# Altium PCB Inc_filter_v2.PcbDoc (part 1 of 4)
Units mm, origin at the board's own origin, x right, y up, seen from the top; angles counter-clockwise.
Board outline 339.6 x 339.6 mm, 2 copper layers (Top Layer, Bottom Layer); 640 components, 290 nets, 1708 pads, 357 vias.
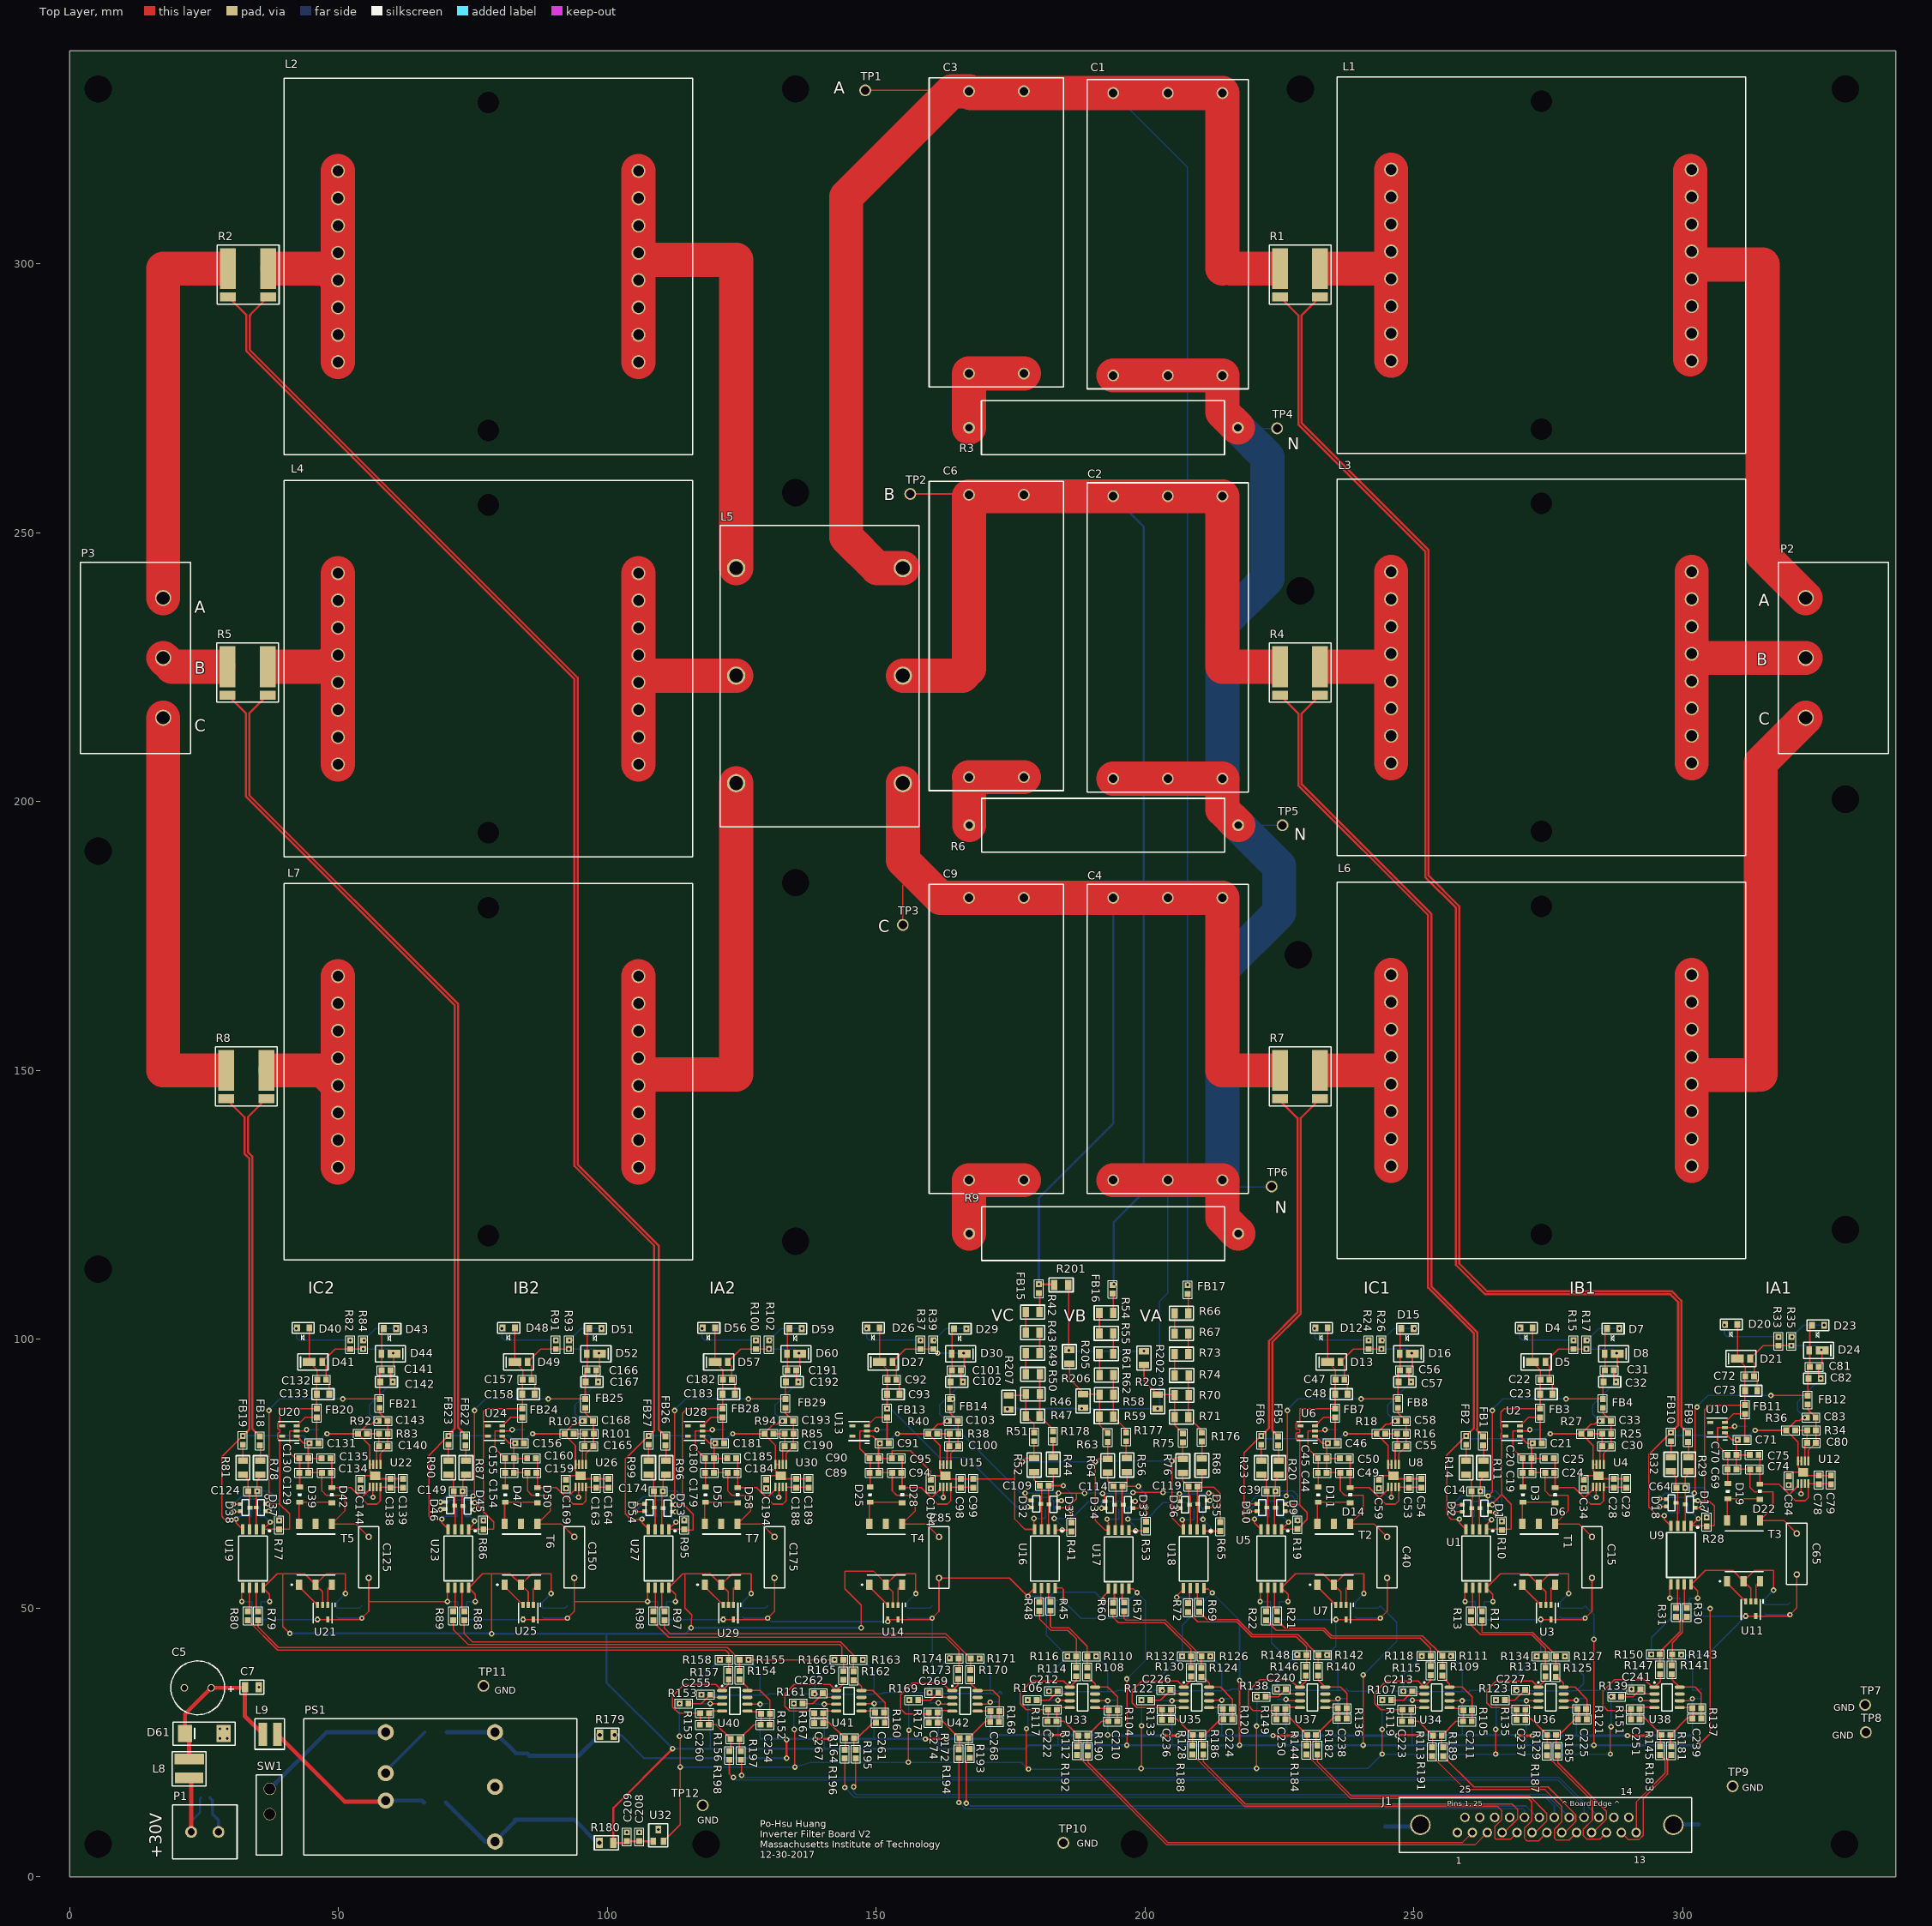
[diagram p0: Top Layer view]
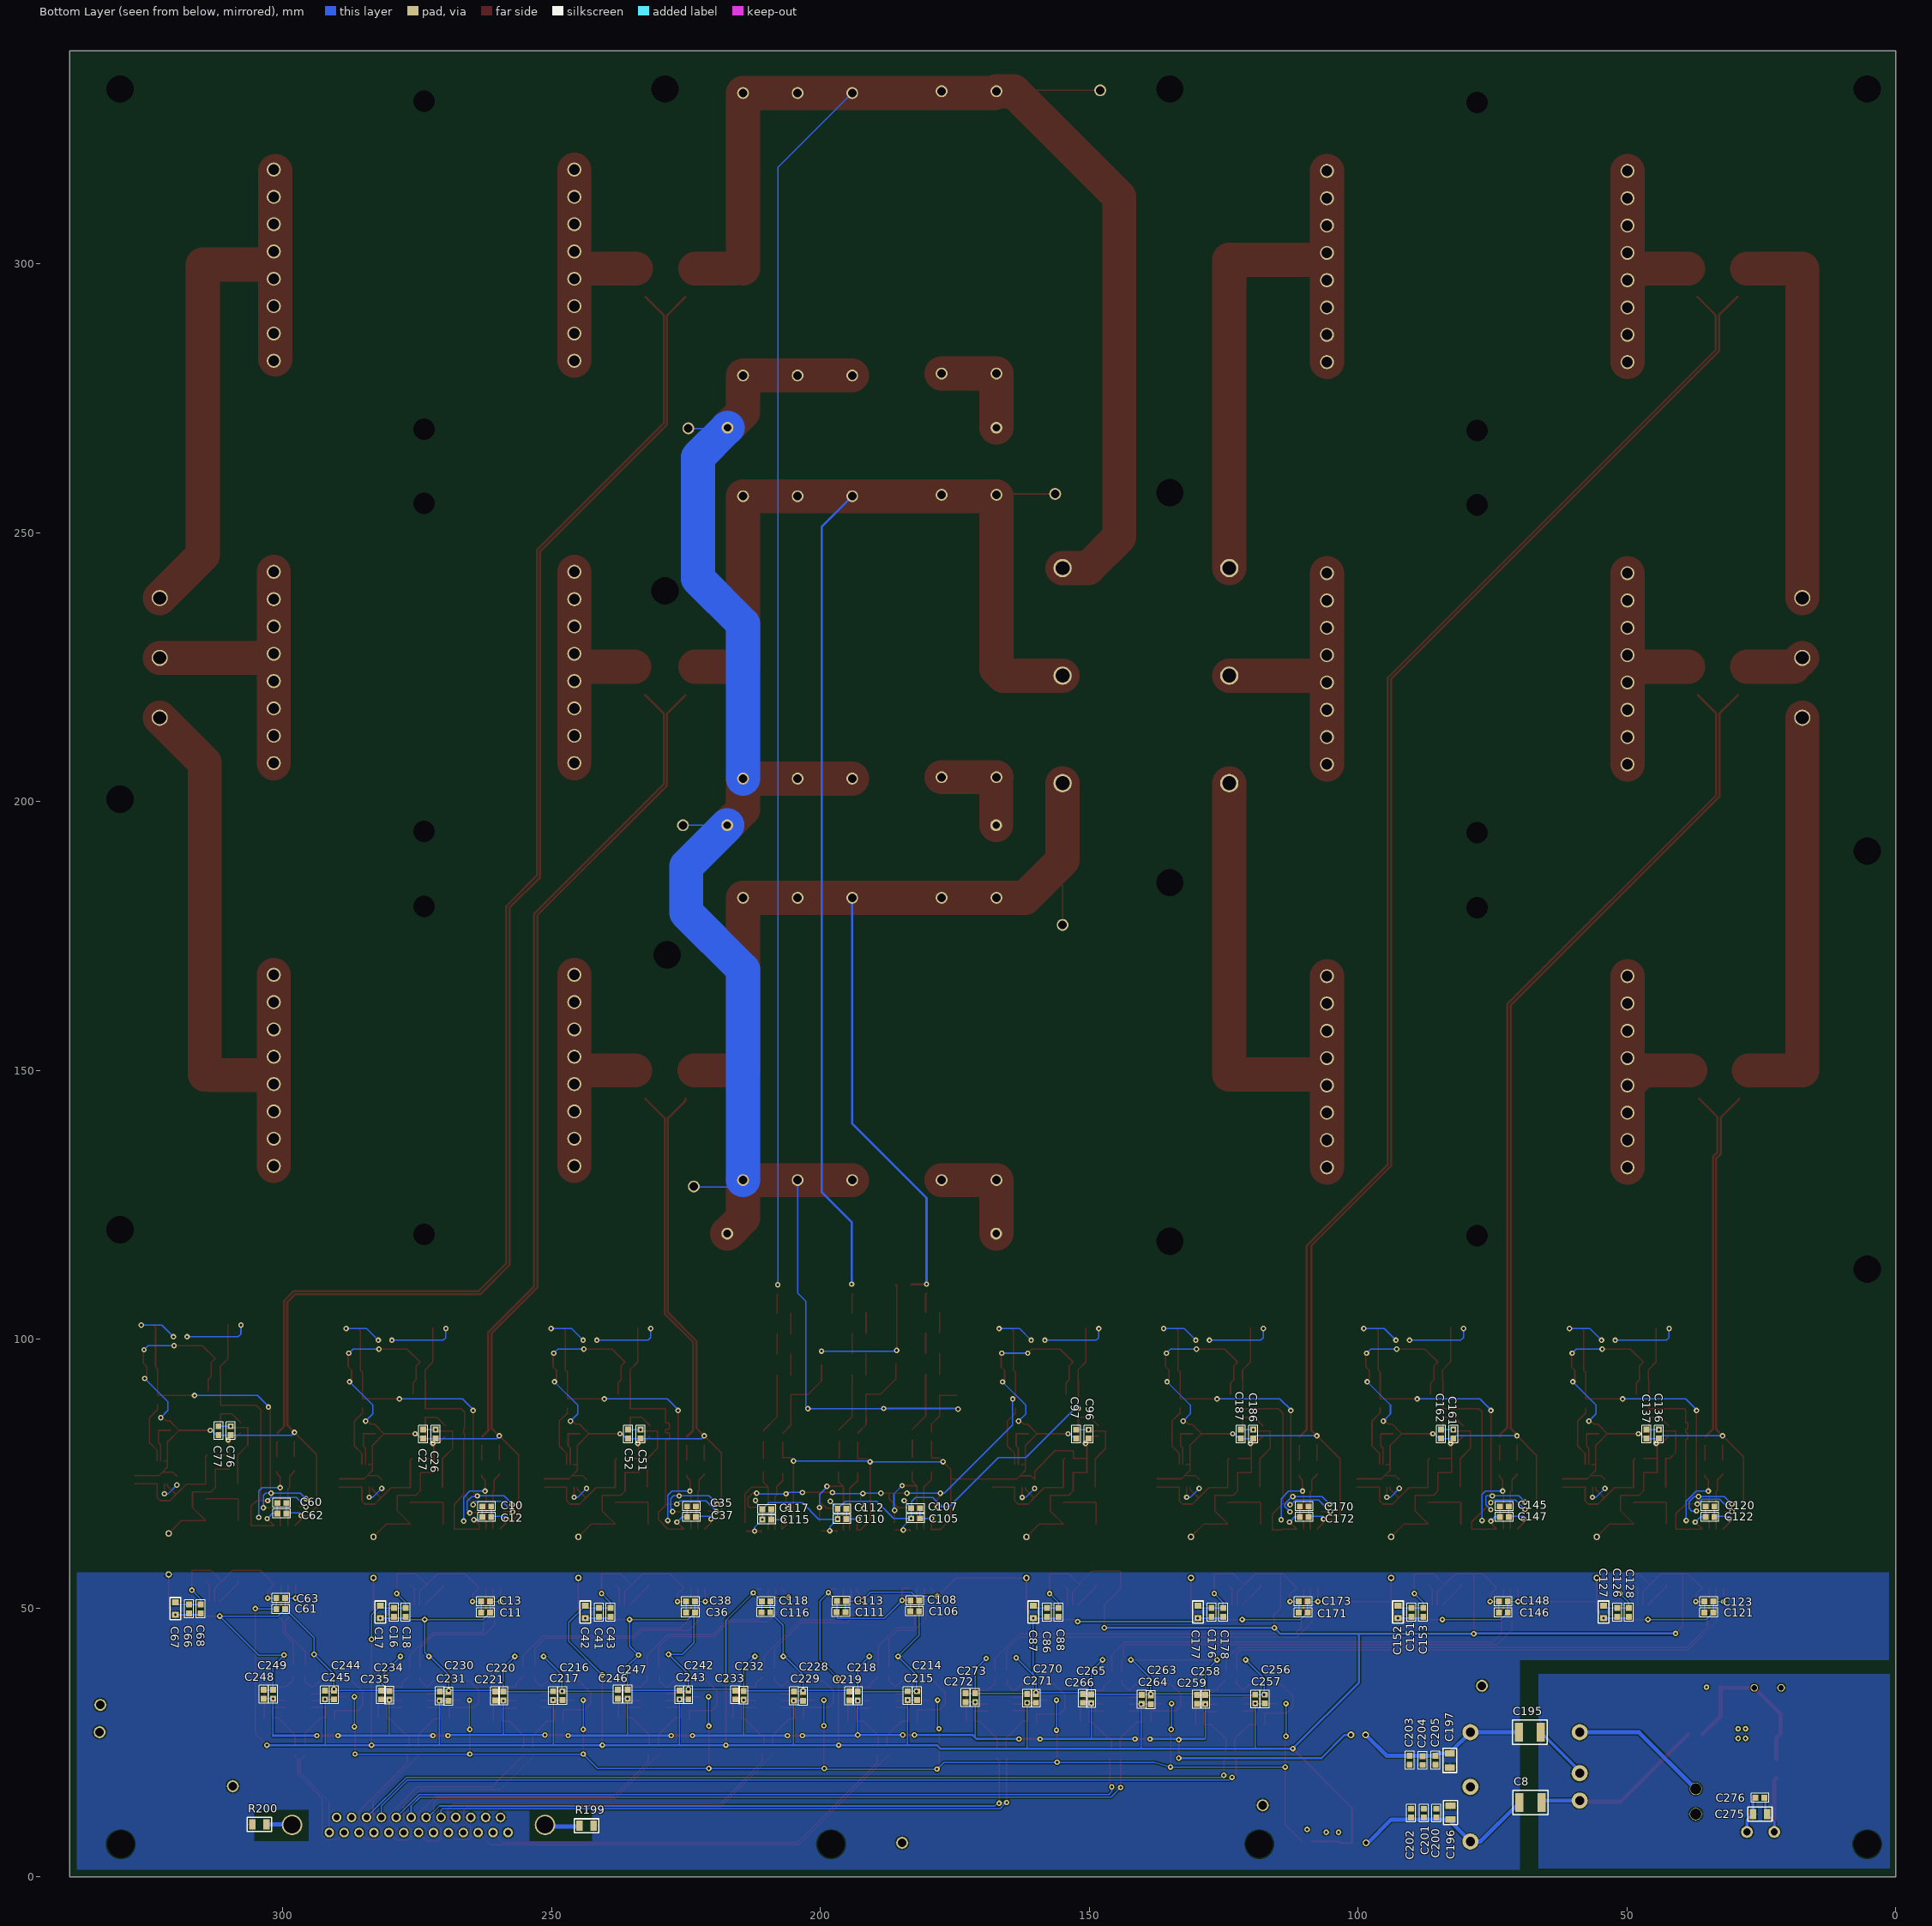
[diagram p1: Bottom Layer view, seen from below]

## Layer stack, top to bottom
Top Solder: solder mask 0.0102, Solder Resist, Dk 3.5
Top Layer: signal copper 0.0711
Dielectric 1: dielectric 0.32, FR-4, Dk 4.8
Bottom Layer: signal copper 0.0711
Bottom Solder: solder mask 0.0102, Solder Resist, Dk 3.5

## Board outline
0,0 339.598,0 339.598,339.598 0,339.598

## Design rules (kind name [scope] priority, off if disabled: settings)
Clearance [All] p1: gap=0.203 ignorepadtopadclearanceinfootprint=FALSE
HoleSize [All] p1: absolutevalues=TRUE maxlimit=5.08 minlimit=0.381 maxpercent=80.000 minpercent=20.000
MinimumSolderMaskSliver [All] p1: minsoldermaskwidth=0.152
PolygonConnect [All] p1: connectstyle=Relief reliefconductorwidth=0.254 reliefentries=4 polygonreliefangle="90 Angle" airgapwidth=0.254
RoutingVias [All] p1: holewidth=0.508 width=1.016 viastyle="Through Hole" minholewidth=0.508 minwidth=1.016 maxholewidth=0.635 maxwidth=1.27
SilkToSilkClearance [All] p1 off: silktosilkclearance=0.254
SilkToSolderMaskClearance [IsPad] p1 off: minsilkscreentomaskgap=0.254 clearancetoexposedcopper=TRUE
SolderMaskExpansion [All] p1: expansion=0
Width [All] p1: maxlimit=10.16 minlimit=0.178 preferedwidth=0.254
26 further rules are at their usual default settings.

## Classes and differential pairs
component class "Power Supply": C5 C7 C8 C195 C196 C197 C200 C201 C202 C203 C204 C205 C275 C276 D61 L8 L9 P1 PS1 R179 R180 SW1
component class Out_current_sensor_UVW: C120 C121 C122 C123 C124 C125 C126 C127 C128 C129 C130 C131 C132 C133 C134 C135 C136 C137 C138 C139 C140 C141 C142 C143 C144 C145 C146 C147 C148 C149 C150 C151 C152 C153 C154 C155 C156 C157 C158 C159 C160 C161 C162 C163 C164 C165 C166 C167 C168 C169 C170 C171 C172 C173 C174 C175 C176 C177 C178 C179 C180 C181 C182 C183 C184 C185 C186 C187 C188 C189 C190 C191 C192 C193 C194 D37 D38 D39 D40 D41 D42 D43 D44 D45 D46 D47 D48 D49 D50 D51 D52 D53 D54 D55 D56 D57 D58 D59 D60 FB18 FB19 FB20 FB21 FB22 FB23 FB24 FB25 FB26 FB27 FB28 FB29 R77 R78 R79 R80 R81 R82 R83 R84 R85 R86 R87 R88 R89 R90 R91 R92 R93 R94 R95 R96 R97 R98 R99 R100 R101 R102 R103 T5 T6 T7 U19 U20 U21 U22 U23 U24 U25 U26 U27 U28 U29 U30
component class Voltage_sensor_UVW: C85 C86 C87 C88 C89 C90 C91 C92 C93 C94 C95 C96 C97 C98 C99 C100 C101 C102 C103 C104 C105 C106 C107 C108 C109 C110 C111 C112 C113 C114 C115 C116 C117 C118 C119 D25 D26 D27 D28 D29 D30 D31 D32 D33 D34 D35 D36 FB13 FB14 FB15 FB16 FB17 R37 R38 R39 R40 R41 R42 R43 R44 R45 R46 R47 R48 R49 R50 R51 R52 R53 R54 R55 R56 R57 R58 R59 R60 R61 R62 R63 R64 R65 R66 R67 R68 R69 R70 R71 R72 R73 R74 R75 R76 R176 R177 R178 R201 R202 R203 R205 R206 R207 R? T4 U13 U14 U15 U16 U17 U18
component class Ind_current_sensor: C10 C11 C12 C13 C14 C15 C16 C17 C18 C19 C20 C21 C22 C23 C24 C25 C26 C27 C28 C29 C30 C31 C32 C33 C34 C35 C36 C37 C38 C39 C40 C41 C42 C43 C44 C45 C46 C47 C48 C49 C50 C51 C52 C53 C54 C55 C56 C57 C58 C59 C60 C61 C62 C63 C64 C65 C66 C67 C68 C69 C70 C71 C72 C73 C74 C75 C76 C77 C78 C79 C80 C81 C82 C83 C84 D1 D2 D3 D4 D5 D6 D7 D8 D9 D10 D11 D12 D13 D14 D15 D16 D17 D18 D19 D20 D21 D22 D23 D24 FB1 FB2 FB3 FB4 FB5 FB6 FB7 FB8 FB9 FB10 FB11 FB12 R10 R11 R12 R13 R14 R15 R16 R17 R18 R19 R20 R21 R22 R23 R24 R25 R26 R27 R28 R29 R30 R31 R32 R33 R34 R35 R36 T1 T2 T3 U1 U2 U3 U4 U5 U6 U7 U8 U9 U10 U11 U12
component class LCL: C1 C2 C3 C4 C6 C9 L1 L2 L3 L4 L5 L6 P2 P3 R1 R2 R3 R4 R5 R6 R7 R8 R9 TP1 TP2 TP3 TP4 TP5 TP6
component class "Analog Transmission": C208 C209 C210 C211 C212 C213 C214 C215 C216 C217 C218 C219 C220 C221 C222 C223 C224 C225 C226 C227 C228 C229 C230 C231 C232 C233 C234 C235 C236 C237 C238 C239 C240 C241 C242 C243 C244 C245 C246 C247 C248 C249 C250 C251 C254 C255 C256 C257 C258 C259 C260 C261 C262 C263 C264 C265 C266 C267 C268 C269 C270 C271 C272 C273 C274 J1 R104 R105 R106 R107 R108 R109 R110 R111 R112 R113 R114 R115 R116 R117 R118 R119 R120 R121 R122 R123 R124 R125 R126 R127 R128 R129 R130 R131 R132 R133 R134 R135 R136 R137 R138 R139 R140 R141 R142 R143 R144 R145 R146 R147 R148 R149 R150 R151 R152 R153 R154 R155 R156 R157 R158 R159 R160 R161 R162 R163 R164 R165 R166 R167 R168 R169 R170 R171 R172 R173 R174 R175 R181 R182 R183 R184 R185 R186 R187 R188 R189 R190 R191 R192 R193 R194 R195 R196 R197 R198 R199 R200 TP7 TP8 TP9 TP10 TP11 TP12 U32 U36 U38

## Components (designator, comment, footprint, x,y, rotation, side; value= is the part's Value field where it differs from the comment)
C1 "Cap Film Radial - 4 Leads" "Radial - 4 Leads - 30uF" 204.216,305.47 r90 top
C2 "Cap Film Radial - 4 Leads" "Radial - 4 Leads - 30uF" 204.216,230.505 r90 top
C3 "Cap Film Radial - 4 Leads" "Radial - 4 Leads" 172.339,305.816 r90 top
C4 "Cap Film Radial - 4 Leads" "Radial - 4 Leads - 30uF" 204.216,155.837 r90 top
C5 "330uF 50V" "Panasonic ECA-1HM331" 26.336,35.179 r180 top
C6 "Cap Film Radial - 4 Leads" "Radial - 4 Leads" 172.339,230.759 r90 top
C7 "Cap 1206" 1206 33.909,35.306 r180 top value="1uF 50V"
C8 "Cap 1nF 2kV" "1812 (4532 Metric)" 67.945,13.843 r90 bottom
C9 "Cap Film Radial - 4 Leads" "Radial - 4 Leads" 172.339,155.837 r90 top
C10 "Cap 0603_new" "0603 (1608 Metric)" 262.039,68.909 r0 bottom value=1uF
C11 "Cap 0603_new" "0603 (1608 Metric)" 262.23,49.199 r180 bottom value=1uF
C12 "Cap 0603_new" "0603 (1608 Metric)" 262.039,66.979 r0 bottom value=0.1uF
C13 "Cap 0603_new" "0603 (1608 Metric)" 262.23,51.231 r180 bottom value=0.1uF
C14 "Cap 0603_new" "0603 (1608 Metric)" 261.518,71.754 r180 top value=330pF
C15 "Cap TH" RAD-0.3 283.09,59.436 r90 top value=1000pF
C16 "Cap 0603_new" "0603 (1608 Metric)" 279.28,49.212 r90 bottom value=10uF
C17 "Cap 0805" "0805 (2012 metric)" 281.82,49.276 r90 bottom value=22uF
C18 "Cap 0603_new" "0603 (1608 Metric)" 277.121,49.212 r90 bottom value=0.1uF
C19 "Cap 0603_new" "0603 (1608 Metric)" 271.025,75.184 r180 top value=10uF
C20 "Cap 0603_new" "0603 (1608 Metric)" 271.025,77.851 r180 top value=0.1uF
C21 "Cap 0603_new" "0603 (1608 Metric)" 272.93,80.645 r0 top value=10uF
C22 "Cap 0603_new" "0603 (1608 Metric)" 274.327,92.456 r180 top value=0.1uF
C23 "Cap 0805" "0805 (2012 metric)" 274.581,89.789 r180 top value=4.7uF
C24 "Cap 0603_new" "0603 (1608 Metric)" 275.216,75.184 r180 top value=10uF
C25 "Cap 0603_new" "0603 (1608 Metric)" 275.153,77.851 r180 top value=0.1uF
C26 "Cap 0603_new" "0603 (1608 Metric)" 271.533,82.36 r90 bottom value=10uF
C27 "Cap 0603_new" "0603 (1608 Metric)" 273.819,82.36 r90 bottom value=0.1uF
C28 "Cap 0603_new" "0603 (1608 Metric)" 287.154,73.215 r270 top value=10uF
C29 "Cap 0603_new" "0603 (1608 Metric)" 289.44,73.216 r270 top value=0.1uF
C30 "Cap 0603_new" "0603 (1608 Metric)" 285.821,80.137 r180 top value=0.01uF
C31 "Cap 0603_new" "0603 (1608 Metric)" 286.329,94.234 r180 top value=0.1uF
C32 "Cap 0805" "0805 (2012 metric)" 286.385,92.075 r180 top value=4.7uF
C33 "Cap 0603_new" "0603 (1608 Metric)" 285.757,84.836 r0 top value=10uF
C34 "Cap 0603_new" "0603 (1608 Metric)" 281.566,73.088 r270 top value=0.01uF
C35 "Cap 0603_new" "0603 (1608 Metric)" 223.939,68.909 r0 bottom value=1uF
C36 "Cap 0603_new" "0603 (1608 Metric)" 224.13,49.199 r180 bottom value=1uF
C37 "Cap 0603_new" "0603 (1608 Metric)" 223.939,66.979 r0 bottom value=0.1uF
C38 "Cap 0603_new" "0603 (1608 Metric)" 224.13,51.231 r180 bottom value=0.1uF
C39 "Cap 0603_new" "0603 (1608 Metric)" 223.418,71.754 r180 top value=330pF
C40 "Cap TH" RAD-0.3 244.99,59.436 r90 top value=1000pF
C41 "Cap 0603_new" "0603 (1608 Metric)" 241.18,49.212 r90 bottom value=10uF
C42 "Cap 0805" "0805 (2012 metric)" 243.72,49.276 r90 bottom value=22uF
C43 "Cap 0603_new" "0603 (1608 Metric)" 239.021,49.212 r90 bottom value=0.1uF
C44 "Cap 0603_new" "0603 (1608 Metric)" 232.925,75.184 r180 top value=10uF
C45 "Cap 0603_new" "0603 (1608 Metric)" 232.925,77.851 r180 top value=0.1uF
C46 "Cap 0603_new" "0603 (1608 Metric)" 234.83,80.645 r0 top value=10uF
C47 "Cap 0603_new" "0603 (1608 Metric)" 236.227,92.456 r180 top value=0.1uF
C48 "Cap 0805" "0805 (2012 metric)" 236.481,89.789 r180 top value=4.7uF
C49 "Cap 0603_new" "0603 (1608 Metric)" 237.116,75.184 r180 top value=10uF
C50 "Cap 0603_new" "0603 (1608 Metric)" 237.053,77.851 r180 top value=0.1uF
C51 "Cap 0603_new" "0603 (1608 Metric)" 233.433,82.36 r90 bottom value=10uF
C52 "Cap 0603_new" "0603 (1608 Metric)" 235.719,82.36 r90 bottom value=0.1uF
C53 "Cap 0603_new" "0603 (1608 Metric)" 249.054,73.215 r270 top value=10uF
C54 "Cap 0603_new" "0603 (1608 Metric)" 251.34,73.216 r270 top value=0.1uF
C55 "Cap 0603_new" "0603 (1608 Metric)" 247.721,80.137 r180 top value=0.01uF
C56 "Cap 0603_new" "0603 (1608 Metric)" 248.229,94.234 r180 top value=0.1uF
C57 "Cap 0805" "0805 (2012 metric)" 248.285,92.075 r180 top value=4.7uF
C58 "Cap 0603_new" "0603 (1608 Metric)" 247.657,84.836 r0 top value=10uF
C59 "Cap 0603_new" "0603 (1608 Metric)" 243.466,73.088 r270 top value=0.01uF
C60 "Cap 0603_new" "0603 (1608 Metric)" 300.132,69.544 r0 bottom value=1uF
C61 "Cap 0603_new" "0603 (1608 Metric)" 300.323,49.834 r180 bottom value=1uF
C62 "Cap 0603_new" "0603 (1608 Metric)" 300.132,67.614 r0 bottom value=0.1uF
C63 "Cap 0603_new" "0603 (1608 Metric)" 300.323,51.866 r180 bottom value=0.1uF
C64 "Cap 0603_new" "0603 (1608 Metric)" 299.611,72.389 r180 top value=330pF
C65 "Cap TH" RAD-0.3 321.183,60.071 r90 top value=1000pF
C66 "Cap 0603_new" "0603 (1608 Metric)" 317.373,49.847 r90 bottom value=10uF
C67 "Cap 0805" "0805 (2012 metric)" 319.913,49.911 r90 bottom value=22uF
C68 "Cap 0603_new" "0603 (1608 Metric)" 315.214,49.847 r90 bottom value=0.1uF
C69 "Cap 0603_new" "0603 (1608 Metric)" 309.118,75.819 r180 top value=10uF
C70 "Cap 0603_new" "0603 (1608 Metric)" 309.118,78.486 r180 top value=0.1uF
C71 "Cap 0603_new" "0603 (1608 Metric)" 311.023,81.28 r0 top value=10uF
C72 "Cap 0603_new" "0603 (1608 Metric)" 312.42,93.091 r180 top value=0.1uF
C73 "Cap 0805" "0805 (2012 metric)" 312.674,90.424 r180 top value=4.7uF
C74 "Cap 0603_new" "0603 (1608 Metric)" 313.309,75.819 r180 top value=10uF
C75 "Cap 0603_new" "0603 (1608 Metric)" 313.246,78.486 r180 top value=0.1uF
C76 "Cap 0603_new" "0603 (1608 Metric)" 309.626,82.995 r90 bottom value=10uF
C77 "Cap 0603_new" "0603 (1608 Metric)" 311.912,82.995 r90 bottom value=0.1uF
C78 "Cap 0603_new" "0603 (1608 Metric)" 325.247,73.85 r270 top value=10uF
C79 "Cap 0603_new" "0603 (1608 Metric)" 327.533,73.851 r270 top value=0.1uF
C80 "Cap 0603_new" "0603 (1608 Metric)" 323.914,80.772 r180 top value=0.01uF
C81 "Cap 0603_new" "0603 (1608 Metric)" 324.422,94.869 r180 top value=0.1uF
C82 "Cap 0805" "0805 (2012 metric)" 324.478,92.71 r180 top value=4.7uF
C83 "Cap 0603_new" "0603 (1608 Metric)" 323.85,85.471 r0 top value=10uF
C84 "Cap 0603_new" "0603 (1608 Metric)" 319.659,73.723 r270 top value=0.01uF
C85 "Cap TH" RAD-0.3 161.671,59.429 r90 top value=1000pF
C86 "Cap 0603_new" "0603 (1608 Metric)" 157.861,49.205 r90 bottom value=10uF
C87 "Cap 0805" "0805 (2012 metric)" 160.401,49.269 r90 bottom value=22uF
C88 "Cap 0603_new" "0603 (1608 Metric)" 155.702,49.205 r90 bottom value=0.1uF
C89 "Cap 0603_new" "0603 (1608 Metric)" 149.606,75.177 r180 top value=10uF
C90 "Cap 0603_new" "0603 (1608 Metric)" 149.606,77.844 r180 top value=0.1uF
C91 "Cap 0603_new" "0603 (1608 Metric)" 151.511,80.638 r0 top value=10uF
C92 "Cap 0603_new" "0603 (1608 Metric)" 152.908,92.449 r180 top value=0.1uF
C93 "Cap 0805" "0805 (2012 metric)" 153.162,89.782 r180 top value=4.7uF
C94 "Cap 0603_new" "0603 (1608 Metric)" 153.797,75.177 r180 top value=10uF
C95 "Cap 0603_new" "0603 (1608 Metric)" 153.734,77.844 r180 top value=0.1uF
C96 "Cap 0603_new" "0603 (1608 Metric)" 150.114,82.353 r90 bottom value=10uF
C97 "Cap 0603_new" "0603 (1608 Metric)" 152.4,82.353 r90 bottom value=0.1uF
C98 "Cap 0603_new" "0603 (1608 Metric)" 165.735,73.208 r270 top value=10uF
C99 "Cap 0603_new" "0603 (1608 Metric)" 168.021,73.209 r270 top value=0.1uF
C100 "Cap 0603_new" "0603 (1608 Metric)" 164.402,80.13 r180 top value=0.01uF
C101 "Cap 0603_new" "0603 (1608 Metric)" 164.91,94.227 r180 top value=0.1uF
C102 "Cap 0805" "0805 (2012 metric)" 164.966,92.068 r180 top value=4.7uF
C103 "Cap 0603_new" "0603 (1608 Metric)" 164.338,84.829 r0 top value=10uF
C104 "Cap 0603_new" "0603 (1608 Metric)" 160.147,73.081 r270 top value=0.01uF
C105 "Cap 0603_new" "0603 (1608 Metric)" 182.275,66.675 r0 bottom value=1uF
C106 "Cap 0603_new" "0603 (1608 Metric)" 182.466,49.403 r180 bottom value=1uF
C107 "Cap 0603_new" "0603 (1608 Metric)" 182.275,68.58 r0 bottom value=0.1uF
C108 "Cap 0603_new" "0603 (1608 Metric)" 182.402,51.435 r180 bottom value=0.1uF
C109 "Cap 0603_new" "0603 (1608 Metric)" 181.259,72.771 r180 top value=330pF
C110 "Cap 0603_new" "0603 (1608 Metric)" 195.96,66.547 r0 bottom value=1uF
C111 "Cap 0603_new" "0603 (1608 Metric)" 196.151,49.275 r180 bottom value=1uF
C112 "Cap 0603_new" "0603 (1608 Metric)" 195.96,68.452 r0 bottom value=0.1uF
C113 "Cap 0603_new" "0603 (1608 Metric)" 196.087,51.307 r180 bottom value=0.1uF
C114 "Cap 0603_new" "0603 (1608 Metric)" 194.944,72.643 r180 top value=330pF
C115 "Cap 0603_new" "0603 (1608 Metric)" 209.931,66.484 r0 bottom value=1uF
C116 "Cap 0603_new" "0603 (1608 Metric)" 210.122,49.212 r180 bottom value=1uF
C117 "Cap 0603_new" "0603 (1608 Metric)" 209.931,68.389 r0 bottom value=0.1uF
C118 "Cap 0603_new" "0603 (1608 Metric)" 210.058,51.244 r180 bottom value=0.1uF
C119 "Cap 0603_new" "0603 (1608 Metric)" 208.915,72.58 r180 top value=330pF
C120 "Cap 0603_new" "0603 (1608 Metric)" 34.575,68.909 r0 bottom value=1uF
C121 "Cap 0603_new" "0603 (1608 Metric)" 34.766,49.199 r180 bottom value=1uF
C122 "Cap 0603_new" "0603 (1608 Metric)" 34.575,66.979 r0 bottom value=0.1uF
C123 "Cap 0603_new" "0603 (1608 Metric)" 34.766,51.231 r180 bottom value=0.1uF
C124 "Cap 0603_new" "0603 (1608 Metric)" 34.054,71.754 r180 top value=330pF
C125 "Cap TH" RAD-0.3 55.626,59.436 r90 top value=1000pF
C126 "Cap 0603_new" "0603 (1608 Metric)" 51.816,49.212 r90 bottom value=10uF
C127 "Cap 0805" "0805 (2012 metric)" 54.356,49.276 r90 bottom value=22uF
C128 "Cap 0603_new" "0603 (1608 Metric)" 49.657,49.212 r90 bottom value=0.1uF
C129 "Cap 0603_new" "0603 (1608 Metric)" 43.561,75.184 r180 top value=10uF
C130 "Cap 0603_new" "0603 (1608 Metric)" 43.561,77.851 r180 top value=0.1uF
C131 "Cap 0603_new" "0603 (1608 Metric)" 45.466,80.645 r0 top value=10uF
C132 "Cap 0603_new" "0603 (1608 Metric)" 46.863,92.456 r180 top value=0.1uF
C133 "Cap 0805" "0805 (2012 metric)" 47.117,89.789 r180 top value=4.7uF
C134 "Cap 0603_new" "0603 (1608 Metric)" 47.752,75.184 r180 top value=10uF
C135 "Cap 0603_new" "0603 (1608 Metric)" 47.689,77.851 r180 top value=0.1uF
C136 "Cap 0603_new" "0603 (1608 Metric)" 44.069,82.36 r90 bottom value=10uF
C137 "Cap 0603_new" "0603 (1608 Metric)" 46.355,82.36 r90 bottom value=0.1uF
C138 "Cap 0603_new" "0603 (1608 Metric)" 59.69,73.215 r270 top value=10uF
C139 "Cap 0603_new" "0603 (1608 Metric)" 61.976,73.216 r270 top value=0.1uF
C140 "Cap 0603_new" "0603 (1608 Metric)" 58.357,80.137 r180 top value=0.01uF
C141 "Cap 0603_new" "0603 (1608 Metric)" 58.865,94.234 r180 top value=0.1uF
C142 "Cap 0805" "0805 (2012 metric)" 58.921,92.075 r180 top value=4.7uF
C143 "Cap 0603_new" "0603 (1608 Metric)" 58.293,84.836 r0 top value=10uF
C144 "Cap 0603_new" "0603 (1608 Metric)" 54.102,73.088 r270 top value=0.01uF
C145 "Cap 0603_new" "0603 (1608 Metric)" 72.802,68.909 r0 bottom value=1uF
C146 "Cap 0603_new" "0603 (1608 Metric)" 72.993,49.199 r180 bottom value=1uF
C147 "Cap 0603_new" "0603 (1608 Metric)" 72.802,66.979 r0 bottom value=0.1uF
C148 "Cap 0603_new" "0603 (1608 Metric)" 72.993,51.231 r180 bottom value=0.1uF
C149 "Cap 0603_new" "0603 (1608 Metric)" 72.281,71.754 r180 top value=330pF
C150 "Cap TH" RAD-0.3 93.853,59.436 r90 top value=1000pF
C151 "Cap 0603_new" "0603 (1608 Metric)" 90.043,49.212 r90 bottom value=10uF
C152 "Cap 0805" "0805 (2012 metric)" 92.583,49.276 r90 bottom value=22uF
C153 "Cap 0603_new" "0603 (1608 Metric)" 87.884,49.212 r90 bottom value=0.1uF
C154 "Cap 0603_new" "0603 (1608 Metric)" 81.788,75.184 r180 top value=10uF
C155 "Cap 0603_new" "0603 (1608 Metric)" 81.788,77.851 r180 top value=0.1uF
C156 "Cap 0603_new" "0603 (1608 Metric)" 83.693,80.645 r0 top value=10uF
C157 "Cap 0603_new" "0603 (1608 Metric)" 85.09,92.456 r180 top value=0.1uF
C158 "Cap 0805" "0805 (2012 metric)" 85.344,89.789 r180 top value=4.7uF
C159 "Cap 0603_new" "0603 (1608 Metric)" 85.979,75.184 r180 top value=10uF
C160 "Cap 0603_new" "0603 (1608 Metric)" 85.916,77.851 r180 top value=0.1uF
C161 "Cap 0603_new" "0603 (1608 Metric)" 82.296,82.36 r90 bottom value=10uF
C162 "Cap 0603_new" "0603 (1608 Metric)" 84.582,82.36 r90 bottom value=0.1uF
C163 "Cap 0603_new" "0603 (1608 Metric)" 97.917,73.215 r270 top value=10uF
C164 "Cap 0603_new" "0603 (1608 Metric)" 100.203,73.216 r270 top value=0.1uF
C165 "Cap 0603_new" "0603 (1608 Metric)" 96.584,80.137 r180 top value=0.01uF
C166 "Cap 0603_new" "0603 (1608 Metric)" 97.092,94.234 r180 top value=0.1uF
C167 "Cap 0805" "0805 (2012 metric)" 97.148,92.075 r180 top value=4.7uF
C168 "Cap 0603_new" "0603 (1608 Metric)" 96.52,84.836 r0 top value=10uF
C169 "Cap 0603_new" "0603 (1608 Metric)" 92.329,73.088 r270 top value=0.01uF
C170 "Cap 0603_new" "0603 (1608 Metric)" 110.02,68.909 r0 bottom value=1uF
C171 "Cap 0603_new" "0603 (1608 Metric)" 110.211,49.199 r180 bottom value=1uF
C172 "Cap 0603_new" "0603 (1608 Metric)" 110.02,66.979 r0 bottom value=0.1uF
C173 "Cap 0603_new" "0603 (1608 Metric)" 110.211,51.231 r180 bottom value=0.1uF
C174 "Cap 0603_new" "0603 (1608 Metric)" 109.499,71.754 r180 top value=330pF
C175 "Cap TH" RAD-0.3 131.071,59.436 r90 top value=1000pF
C176 "Cap 0603_new" "0603 (1608 Metric)" 127.261,49.212 r90 bottom value=10uF
C177 "Cap 0805" "0805 (2012 metric)" 129.801,49.276 r90 bottom value=22uF
C178 "Cap 0603_new" "0603 (1608 Metric)" 125.102,49.212 r90 bottom value=0.1uF
C179 "Cap 0603_new" "0603 (1608 Metric)" 119.006,75.184 r180 top value=10uF
C180 "Cap 0603_new" "0603 (1608 Metric)" 119.006,77.851 r180 top value=0.1uF
C181 "Cap 0603_new" "0603 (1608 Metric)" 120.911,80.645 r0 top value=10uF
C182 "Cap 0603_new" "0603 (1608 Metric)" 122.308,92.456 r180 top value=0.1uF
C183 "Cap 0805" "0805 (2012 metric)" 122.562,89.789 r180 top value=4.7uF
C184 "Cap 0603_new" "0603 (1608 Metric)" 123.197,75.184 r180 top value=10uF
C185 "Cap 0603_new" "0603 (1608 Metric)" 123.134,77.851 r180 top value=0.1uF
C186 "Cap 0603_new" "0603 (1608 Metric)" 119.514,82.36 r90 bottom value=10uF
C187 "Cap 0603_new" "0603 (1608 Metric)" 121.8,82.36 r90 bottom value=0.1uF
C188 "Cap 0603_new" "0603 (1608 Metric)" 135.135,73.215 r270 top value=10uF
C189 "Cap 0603_new" "0603 (1608 Metric)" 137.421,73.216 r270 top value=0.1uF
C190 "Cap 0603_new" "0603 (1608 Metric)" 133.802,80.137 r180 top value=0.01uF
C191 "Cap 0603_new" "0603 (1608 Metric)" 134.31,94.234 r180 top value=0.1uF
C192 "Cap 0805" "0805 (2012 metric)" 134.366,92.075 r180 top value=4.7uF
C193 "Cap 0603_new" "0603 (1608 Metric)" 133.738,84.836 r0 top value=10uF
C194 "Cap 0603_new" "0603 (1608 Metric)" 129.547,73.088 r270 top value=0.01uF
C195 "Cap 1nF 2kV" "1812 (4532 Metric)" 68.072,26.924 r90 bottom
C196 "Cap 1206" 1206 82.804,11.968 r270 bottom value=100uF
C197 "Cap 1206" 1206 82.931,21.687 r270 bottom value=100uF
C200 "Cap 0603_new" "0603 (1608 Metric)" 85.471,11.874 r270 bottom value=0.1uF
C201 "Cap 0603_new" "0603 (1608 Metric)" 87.757,11.875 r270 bottom value=10nF
C202 "Cap 0603_new" "0603 (1608 Metric)" 90.17,11.875 r270 bottom value=10uF
C203 "Cap 0603_new" "0603 (1608 Metric)" 90.424,21.717 r270 bottom value=0.1uF
C204 "Cap 0603_new" "0603 (1608 Metric)" 88.011,21.654 r270 bottom value=10nF
C205 "Cap 0603_new" "0603 (1608 Metric)" 85.598,21.717 r270 bottom value=10uF
C208 "Cap 0603_new" "0603 (1608 Metric)" 105.918,7.493 r270 top value=10uF
C209 "Cap 0603_new" "0603 (1608 Metric)" 103.632,7.493 r270 top value=0.1uF
C210 "Cap 0603_new" "0603 (1608 Metric)" 193.992,28.956 r0 top value=NC
C211 "Cap 0603_new" "0603 (1608 Metric)" 259.905,28.956 r0 top value=NC
C212 "Cap 0603_new" "0603 (1608 Metric)" 182.944,34.544 r0 top value=0.1uF
C213 "Cap 0603_new" "0603 (1608 Metric)" 248.857,34.544 r0 top value=0.1uF
C214 "Cap 0603_new" "0603 (1608 Metric)" 181.991,33.718 r270 bottom value=0.1uF
C215 "Cap 0603_new" "0603 (1608 Metric)" 183.769,33.718 r270 bottom value=10uF
C216 "Cap 0603_new" "0603 (1608 Metric)" 247.904,33.718 r270 bottom value=0.1uF
C217 "Cap 0603_new" "0603 (1608 Metric)" 249.682,33.718 r270 bottom value=10uF
C218 "Cap 0603_new" "0603 (1608 Metric)" 193.04,33.655 r90 bottom value=0.1uF
C219 "Cap 0603_new" "0603 (1608 Metric)" 194.564,33.655 r90 bottom value=10uF
C220 "Cap 0603_new" "0603 (1608 Metric)" 258.953,33.655 r90 bottom value=0.1uF
C221 "Cap 0603_new" "0603 (1608 Metric)" 260.477,33.655 r90 bottom value=10uF
C222 "Cap 0603_new" "0603 (1608 Metric)" 182.69,28.956 r180 top value=NC
C223 "Cap 0603_new" "0603 (1608 Metric)" 248.603,28.956 r180 top value=NC
C224 "Cap 0603_new" "0603 (1608 Metric)" 215.392,29.337 r0 top value=NC
C225 "Cap 0603_new" "0603 (1608 Metric)" 281.305,29.337 r0 top value=NC
C226 "Cap 0603_new" "0603 (1608 Metric)" 203.899,34.798 r0 top value=0.1uF
C227 "Cap 0603_new" "0603 (1608 Metric)" 269.812,34.798 r0 top value=0.1uF
C228 "Cap 0603_new" "0603 (1608 Metric)" 203.2,33.591 r270 bottom value=0.1uF
C229 "Cap 0603_new" "0603 (1608 Metric)" 204.851,33.655 r270 bottom value=10uF
C230 "Cap 0603_new" "0603 (1608 Metric)" 269.113,33.591 r270 bottom value=0.1uF
C231 "Cap 0603_new" "0603 (1608 Metric)" 270.764,33.655 r270 bottom value=10uF
C232 "Cap 0603_new" "0603 (1608 Metric)" 214.249,33.782 r90 bottom value=0.1uF
C233 "Cap 0603_new" "0603 (1608 Metric)" 215.773,33.845 r90 bottom value=10uF
C234 "Cap 0603_new" "0603 (1608 Metric)" 280.162,33.782 r90 bottom value=0.1uF
C235 "Cap 0603_new" "0603 (1608 Metric)" 281.686,33.845 r90 bottom value=10uF
C236 "Cap 0603_new" "0603 (1608 Metric)" 203.962,29.21 r180 top value=NC
C237 "Cap 0603_new" "0603 (1608 Metric)" 269.875,29.21 r180 top value=NC
C238 "Cap 0603_new" "0603 (1608 Metric)" 236.664,29.464 r0 top value=NC
C239 "Cap 0603_new" "0603 (1608 Metric)" 302.577,29.464 r0 top value=NC
C240 "Cap 0603_new" "0603 (1608 Metric)" 225.362,34.925 r0 top value=0.1uF
C241 "Cap 0603_new" "0603 (1608 Metric)" 291.275,34.925 r0 top value=0.1uF
C242 "Cap 0603_new" "0603 (1608 Metric)" 224.536,33.845 r270 bottom value=0.1uF
C243 "Cap 0603_new" "0603 (1608 Metric)" 226.187,33.845 r270 bottom value=10uF
C244 "Cap 0603_new" "0603 (1608 Metric)" 290.449,33.845 r270 bottom value=0.1uF
C245 "Cap 0603_new" "0603 (1608 Metric)" 292.1,33.845 r270 bottom value=10uF
C246 "Cap 0603_new" "0603 (1608 Metric)" 237.617,33.972 r90 bottom value=0.1uF
C247 "Cap 0603_new" "0603 (1608 Metric)" 235.839,33.972 r90 bottom value=10uF
C248 "Cap 0603_new" "0603 (1608 Metric)" 303.53,33.972 r90 bottom value=0.1uF
C249 "Cap 0603_new" "0603 (1608 Metric)" 301.752,33.972 r90 bottom value=10uF
C250 "Cap 0603_new" "0603 (1608 Metric)" 225.235,29.337 r180 top value=NC
C251 "Cap 0603_new" "0603 (1608 Metric)" 291.148,29.337 r180 top value=NC
C254 "Cap 0603_new" "0603 (1608 Metric)" 129.35,28.321 r0 top value=NC
C255 "Cap 0603_new" "0603 (1608 Metric)" 118.302,33.909 r0 top value=0.1uF
C256 "Cap 0603_new" "0603 (1608 Metric)" 117.349,33.083 r270 bottom value=0.1uF
C257 "Cap 0603_new" "0603 (1608 Metric)" 119.127,33.083 r270 bottom value=10uF
C258 "Cap 0603_new" "0603 (1608 Metric)" 128.398,33.02 r90 bottom value=0.1uF
C259 "Cap 0603_new" "0603 (1608 Metric)" 129.922,33.02 r90 bottom value=10uF
C260 "Cap 0603_new" "0603 (1608 Metric)" 118.048,28.321 r180 top value=NC
C261 "Cap 0603_new" "0603 (1608 Metric)" 150.75,28.702 r0 top value=NC
C262 "Cap 0603_new" "0603 (1608 Metric)" 139.257,34.163 r0 top value=0.1uF
C263 "Cap 0603_new" "0603 (1608 Metric)" 138.558,32.956 r270 bottom value=0.1uF
C264 "Cap 0603_new" "0603 (1608 Metric)" 140.209,33.02 r270 bottom value=10uF
C265 "Cap 0603_new" "0603 (1608 Metric)" 149.607,33.147 r90 bottom value=0.1uF
C266 "Cap 0603_new" "0603 (1608 Metric)" 151.131,33.21 r90 bottom value=10uF
C267 "Cap 0603_new" "0603 (1608 Metric)" 139.32,28.575 r180 top value=NC
C268 "Cap 0603_new" "0603 (1608 Metric)" 172.022,28.829 r0 top value=NC
C269 "Cap 0603_new" "0603 (1608 Metric)" 160.72,34.29 r0 top value=0.1uF
C270 "Cap 0603_new" "0603 (1608 Metric)" 159.894,33.21 r270 bottom value=0.1uF
C271 "Cap 0603_new" "0603 (1608 Metric)" 161.545,33.21 r270 bottom value=10uF
C272 "Cap 0603_new" "0603 (1608 Metric)" 172.975,33.337 r90 bottom value=0.1uF
C273 "Cap 0603_new" "0603 (1608 Metric)" 171.197,33.337 r90 bottom value=10uF
C274 "Cap 0603_new" "0603 (1608 Metric)" 160.593,28.702 r180 top value=NC
C275 "Cap 1206" 1206 25.273,11.684 r0 bottom value="10uF 50V"
C276 "Cap 0603_new" "0603 (1608 Metric)" 25.273,14.732 r0 bottom value=0.1uF
D1 "TVS - Diodes" SOT323_ESD 262.133,68.565 r90 top value=ESD
D2 "TVS - Diodes" SOT323_ESD 260.853,68.565 r270 top value=ESD
D3 "Diode MBR0520" SOD-123 270.263,69.723 r90 top
D4 "LED" "0805 (2012 Metric) Diode" 270.898,102.108 r180 top
D5 "Diode Zener POWERDI123" POWERDI 274.416,95.758 r180 top
D6 "Diode MBR0520" SOD-123 276.232,72.411 r270 top
D7 "LED" "0805 (2012 Metric) Diode" 287.02,101.981 r180 top
D8 "Diode Zener POWERDI123" POWERDI 285.414,97.282 r0 top
D9 "TVS - Diodes" SOT323_ESD 224.16,68.692 r90 top value=ESD
D10 "TVS - Diodes" SOT323_ESD 222.731,68.707 r270 top value=ESD
D11 "Diode MBR0520" SOD-123 232.163,69.723 r90 top
D12 "LED" "0805 (2012 Metric) Diode" 232.798,102.108 r180 top
D13 "Diode Zener POWERDI123" POWERDI 236.316,95.758 r180 top
D14 "Diode MBR0520" SOD-123 238.132,72.411 r270 top
D15 "LED" "0805 (2012 Metric) Diode" 248.793,101.981 r180 top
D16 "Diode Zener POWERDI123" POWERDI 247.314,97.282 r0 top
D17 "TVS - Diodes" SOT323_ESD 300.36,69.327 r90 top value=ESD
D18 "TVS - Diodes" SOT323_ESD 298.826,69.581 r270 top value=ESD
D19 "Diode MBR0520" SOD-123 308.356,70.358 r90 top
D20 "LED" "0805 (2012 Metric) Diode" 308.991,102.743 r180 top
D21 "Diode Zener POWERDI123" POWERDI 312.509,96.393 r180 top
D22 "Diode MBR0520" SOD-123 314.325,73.046 r270 top
D23 "LED" "0805 (2012 Metric) Diode" 325.113,102.616 r180 top
D24 "Diode Zener POWERDI123" POWERDI 323.507,97.917 r0 top
D25 "Diode MBR0520" SOD-123 148.844,69.716 r90 top
D26 "LED" "0805 (2012 Metric) Diode" 149.479,102.101 r180 top
D27 "Diode Zener POWERDI123" POWERDI 152.997,95.751 r180 top
D28 "Diode MBR0520" SOD-123 154.813,72.404 r270 top
D29 "LED" "0805 (2012 Metric) Diode" 165.601,101.974 r180 top
D30 "Diode Zener POWERDI123" POWERDI 163.995,97.275 r0 top
D31 "TVS - Diodes" SOT323_ESD 181.996,69.327 r90 top value=ESD
D32 "TVS - Diodes" SOT323_ESD 180.716,69.357 r270 top value=ESD
D33 "TVS - Diodes" SOT323_ESD 195.861,69.215 r90 top value=ESD
D34 "TVS - Diodes" SOT323_ESD 194.41,69.215 r270 top value=ESD
D35 "TVS - Diodes" SOT323_ESD 209.682,69.357 r90 top value=ESD
D36 "TVS - Diodes" SOT323_ESD 208.38,69.215 r270 top value=ESD
D37 "TVS - Diodes" SOT323_ESD 34.615,68.707 r90 top value=ESD
D38 "TVS - Diodes" SOT323_ESD 33.65,68.692 r270 top value=ESD
D39 "Diode MBR0520" SOD-123 42.799,69.723 r90 top
D40 "LED" "0805 (2012 Metric) Diode" 43.434,102.108 r180 top
D41 "Diode Zener POWERDI123" POWERDI 46.952,95.758 r180 top
D42 "Diode MBR0520" SOD-123 48.768,72.411 r270 top
D43 "LED" "0805 (2012 Metric) Diode" 59.556,101.981 r180 top
D44 "Diode Zener POWERDI123" POWERDI 57.95,97.282 r0 top
D45 "TVS - Diodes" SOT323_ESD 73.052,68.961 r90 top value=ESD
D46 "TVS - Diodes" SOT323_ESD 71.728,69.088 r270 top value=ESD
D47 "Diode MBR0520" SOD-123 81.026,69.723 r90 top
D48 "LED" "0805 (2012 Metric) Diode" 81.661,102.108 r180 top
D49 "Diode Zener POWERDI123" POWERDI 85.179,95.758 r180 top
D50 "Diode MBR0520" SOD-123 86.995,72.411 r270 top
D51 "LED" "0805 (2012 Metric) Diode" 97.783,101.981 r180 top
D52 "Diode Zener POWERDI123" POWERDI 96.177,97.282 r0 top
D53 "TVS - Diodes" SOT323_ESD 110.241,68.565 r90 top value=ESD
D54 "TVS - Diodes" SOT323_ESD 108.812,68.707 r270 top value=ESD
D55 "Diode MBR0520" SOD-123 118.244,69.723 r90 top
D56 "LED" "0805 (2012 Metric) Diode" 118.879,102.108 r180 top
D57 "Diode Zener POWERDI123" POWERDI 122.397,95.758 r180 top
D58 "Diode MBR0520" SOD-123 124.213,72.411 r270 top
D59 "LED" "0805 (2012 Metric) Diode" 135.001,101.981 r180 top
D60 "Diode Zener POWERDI123" POWERDI 133.395,97.282 r0 top
D61 "DIODE TVS" SMCJ48A 28.663,26.67 r180 top
FB1 "Ferrite bead" "0603 (1608 Metric)" 262.839,81.113 r270 top value=1K
FB2 "Ferrite bead" "0603 (1608 Metric)" 259.69,81.215 r270 top value=1K
FB3 "Ferrite bead" "0603 (1608 Metric)" 273.438,86.296 r90 top value=1K
FB4 "Ferrite bead" "0603 (1608 Metric)" 285.122,88.074 r90 top value=1K
FB5 "Ferrite bead" "0603 (1608 Metric)" 224.739,81.113 r270 top value=1K
FB6 "Ferrite bead" "0603 (1608 Metric)" 221.59,81.215 r270 top value=1K
FB7 "Ferrite bead" "0603 (1608 Metric)" 235.338,86.296 r90 top value=1K
FB8 "Ferrite bead" "0603 (1608 Metric)" 247.022,88.074 r90 top value=1K
FB9 "Ferrite bead" "0603 (1608 Metric)" 300.932,81.748 r270 top value=1K
FB10 "Ferrite bead" "0603 (1608 Metric)" 297.783,81.85 r270 top value=1K
FB11 "Ferrite bead" "0603 (1608 Metric)" 311.531,86.931 r90 top value=1K
FB12 "Ferrite bead" "0603 (1608 Metric)" 323.215,88.709 r90 top value=1K
FB13 "Ferrite bead" "0603 (1608 Metric)" 152.019,86.289 r90 top value=1K
FB14 "Ferrite bead" "0603 (1608 Metric)" 163.703,88.067 r90 top value=1K
FB15 "Ferrite bead" "0603 (1608 Metric)" 180.243,109.411 r270 top value=1K
FB16 "Ferrite bead" "0603 (1608 Metric)" 193.928,109.283 r270 top value=1K
FB17 "Ferrite bead" "0603 (1608 Metric)" 207.899,109.22 r270 top value=1K
FB18 "Ferrite bead" "0603 (1608 Metric)" 35.375,81.113 r270 top value=1K
FB19 "Ferrite bead" "0603 (1608 Metric)" 32.226,81.215 r270 top value=1K
FB20 "Ferrite bead" "0603 (1608 Metric)" 45.974,86.296 r90 top value=1K
FB21 "Ferrite bead" "0603 (1608 Metric)" 57.658,88.074 r90 top value=1K
FB22 "Ferrite bead" "0603 (1608 Metric)" 73.602,81.113 r270 top value=1K
FB23 "Ferrite bead" "0603 (1608 Metric)" 70.453,81.215 r270 top value=1K
FB24 "Ferrite bead" "0603 (1608 Metric)" 84.201,86.296 r90 top value=1K
FB25 "Ferrite bead" "0603 (1608 Metric)" 95.885,88.074 r90 top value=1K
FB26 "Ferrite bead" "0603 (1608 Metric)" 110.82,81.113 r270 top value=1K
FB27 "Ferrite bead" "0603 (1608 Metric)" 107.671,81.215 r270 top value=1K
FB28 "Ferrite bead" "0603 (1608 Metric)" 121.419,86.296 r90 top value=1K
FB29 "Ferrite bead" "0603 (1608 Metric)" 133.103,88.074 r90 top value=1K
J1 "DB25 conn" "Connector D-Sub Receptacle 25 pos" 274.694,9.675 r0 top
L1 "Inductor N27 315nH PM6249" IND_PM6249 273.685,299.72 r90 top
L2 "Inductor N27 315nH PM6249" IND_PM6249 77.851,299.466 r90 top
L3 "Inductor N27 315nH PM6249" IND_PM6249 273.685,224.917 r90 top
L4 "Inductor N27 315nH PM6249" IND_PM6249 77.851,224.663 r90 top
L5 "CMC 2.2MH 16A" "CM Choke" 139.452,223.393 r90 top
L6 "Inductor N27 315nH PM6249" IND_PM6249 273.685,149.987 r90 top
L7 "Inductor N27 315nH PM6249" IND_PM6249 77.851,149.733 r90 top
L8 "Inductor 56uH" "Ind SM 56UH" 22.225,18.415 r0 top
L9 "Inductor 4_7UH" "Ind SM 4_7UH" 35.941,26.543 r270 top
P1 "OSTYC022150" "2 pin Terminal" 25.146,8.382 r0 top
P2 "CONN BARRIER" "Terminal Barrier 3PIN" 322.834,226.695 r90 top
P3 "CONN BARRIER" "Terminal Barrier 3PIN" 17.399,226.695 r270 top
PS1 "PYB10-Q24-D5" "6-DIP Module" 58.801,26.924 r0 top
R1 "Resistor Precision" "Res Precision CSM3637Z" 225.067,299.085 r270 top value=0.05R
R2 "Resistor Precision" "Res Precision CSM3637Z" 29.464,299.085 r270 top value=0.05R
R3 "Resistor Power" "Axial 50mm" 217.259,269.494 r180 top value=10R
R4 "Resistor Precision" "Res Precision CSM3637Z" 225.067,225.044 r270 top value=0.05R
R5 "Resistor Precision" "Res Precision CSM3637Z" 29.36,225.044 r270 top value=0.05R
R6 "Resistor Power" "Axial 50mm" 217.297,195.58 r180 top value=10R
R7 "Resistor Precision" "Res Precision CSM3637Z" 225.067,149.987 r270 top value=0.05R
R8 "Resistor Precision" "Res Precision CSM3637Z" 29.106,149.987 r270 top value=0.05R
R9 "Resistor Power" "Axial 50mm" 217.297,119.634 r180 top value=10R
R10 "NC" "0603 (1608 Metric)" 266.319,65.341 r270 top value=160k
R11 "Resistor 1206" 1206 262.941,76.102 r270 top value=12R
R12 "Resistor 0603" "0603 (1608 Metric)" 262.636,48.577 r270 top value=0R
R13 "Resistor 0603" "0603 (1608 Metric)" 260.604,48.577 r270 top value=0R
R14 "Resistor 1206" 1206 259.69,76.102 r270 top value=12R
R15 "Resistor 0603" "0603 (1608 Metric)" 279.661,98.996 r90 top value=3.9k
R16 "Resistor 0603" "0603 (1608 Metric)" 247.65,82.423 r0 top value=32.4k
R17 "Resistor 0603" "0603 (1608 Metric)" 282.074,98.997 r90 top value=3.9k
R18 "Resistor 0603" "0603 (1608 Metric)" 243.847,82.423 r0 top value=10k
R19 "NC" "0603 (1608 Metric)" 228.346,65.532 r270 top value=160k
R20 "Resistor 1206" 1206 224.841,76.102 r270 top value=12R
R21 "Resistor 0603" "0603 (1608 Metric)" 224.536,48.577 r270 top value=0R
R22 "Resistor 0603" "0603 (1608 Metric)" 222.504,48.577 r270 top value=0R
R23 "Resistor 1206" 1206 221.59,76.102 r270 top value=12R
R24 "Resistor 0603" "0603 (1608 Metric)" 241.561,98.996 r90 top value=3.9k
R25 "Resistor 0603" "0603 (1608 Metric)" 285.82,82.423 r0 top value=32.4k
R26 "Resistor 0603" "0603 (1608 Metric)" 243.974,98.997 r90 top value=3.9k
R27 "Resistor 0603" "0603 (1608 Metric)" 281.94,82.423 r0 top value=10k
R28 "NC" "0603 (1608 Metric)" 304.419,66.04 r270 top value=160k
R29 "Resistor 1206" 1206 301.034,76.737 r270 top value=12R
R30 "Resistor 0603" "0603 (1608 Metric)" 300.729,49.212 r270 top value=10R
R31 "Resistor 0603" "0603 (1608 Metric)" 298.697,49.212 r270 top value=10R
R32 "Resistor 1206" 1206 297.783,76.737 r270 top value=12R
R33 "Resistor 0603" "0603 (1608 Metric)" 317.754,99.631 r90 top value=3.9k
R34 "Resistor 0603" "0603 (1608 Metric)" 323.913,83.058 r0 top value=32.4k
R35 "Resistor 0603" "0603 (1608 Metric)" 320.167,99.632 r90 top value=3.9k
R36 "Resistor 0603" "0603 (1608 Metric)" 320.04,83.058 r0 top value=10k
R37 "Resistor 0603" "0603 (1608 Metric)" 158.242,98.989 r90 top value=3.9k
R38 "Resistor 0603" "0603 (1608 Metric)" 164.465,82.423 r0 top value=32.4k
R39 "Resistor 0603" "0603 (1608 Metric)" 160.655,98.99 r90 top value=3.9k
R40 "Resistor 0603" "0603 (1608 Metric)" 160.528,82.416 r0 top value=10k
R41 "NC" "0603 (1608 Metric)" 186.309,65.087 r270 top value=160k
R42 "Resistor 1206" 1206 179.1,105.029 r180 top value=NC
R43 "Resistor 1206" 1206 179.1,101.219 r0 top value=NC
R44 "Resistor 1206" 1206 182.91,76.738 r270 top value=12R
R45 "Resistor 0603" "0603 (1608 Metric)" 182.402,50.355 r270 top value=10R
R46 "Resistor 1206" 1206 179.13,89.789 r0 top value=1k
R47 "Resistor 1206" 1206 179.1,85.725 r0 top value=NC
R48 "Resistor 0603" "0603 (1608 Metric)" 180.34,50.292 r270 top value=10R
R49 "Resistor 1206" 1206 179.1,97.409 r180 top value=NC
R50 "Resistor 1206" 1206 179.13,93.472 r0 top value=402k
R51 "Resistor 0603" "0603 (1608 Metric)" 179.354,81.852 r90 top value=0R
R52 "Resistor 1206" 1206 179.354,76.611 r270 top value=12R
R53 "NC" "0603 (1608 Metric)" 200.152,65.278 r270 top value=160k
R54 "Resistor 1206" 1206 192.785,104.901 r180 top value=NC
R55 "Resistor 1206" 1206 192.785,101.091 r0 top value=NC
R56 "Resistor 1206" 1206 196.595,76.61 r270 top value=12R
R57 "Resistor 0603" "0603 (1608 Metric)" 196.087,50.227 r270 top value=10R
R58 "Resistor 1206" 1206 192.815,89.661 r0 top value=1k
R59 "Resistor 1206" 1206 192.785,85.597 r0 top value=NC
R60 "Resistor 0603" "0603 (1608 Metric)" 194.025,50.164 r270 top value=10R
R61 "Resistor 1206" 1206 192.785,97.281 r180 top value=NC
R62 "Resistor 1206" 1206 192.815,93.344 r0 top value=402k
R63 "Resistor 0603" "0603 (1608 Metric)" 193.039,81.724 r90 top value=0R
R64 "Resistor 1206" 1206 193.039,76.483 r270 top value=12R
R65 "NC" "0603 (1608 Metric)" 213.995,65.151 r270 top value=160k
R66 "Resistor 1206" 1206 206.756,104.838 r180 top value=NC
R67 "Resistor 1206" 1206 206.756,101.028 r0 top value=NC
R68 "Resistor 1206" 1206 210.566,76.547 r270 top value=12R
R69 "Resistor 0603" "0603 (1608 Metric)" 210.058,50.164 r270 top value=10R
R70 "Resistor 1206" 1206 206.786,89.598 r0 top value=1k
R71 "Resistor 1206" 1206 206.756,85.534 r0 top value=NC
R72 "Resistor 0603" "0603 (1608 Metric)" 207.996,50.101 r270 top value=10R
R73 "Resistor 1206" 1206 206.756,97.218 r180 top value=NC
R74 "Resistor 1206" 1206 206.786,93.281 r0 top value=402k
R75 "Resistor 0603" "0603 (1608 Metric)" 207.01,81.661 r90 top value=0R
R76 "Resistor 1206" 1206 207.01,76.42 r270 top value=12R
R77 "NC" "0603 (1608 Metric)" 38.989,65.469 r270 top value=160k
R78 "Resistor 1206" 1206 35.477,76.102 r270 top value=12R
R79 "Resistor 0603" "0603 (1608 Metric)" 35.052,48.577 r270 top value=10R
R80 "Resistor 0603" "0603 (1608 Metric)" 33.14,48.577 r270 top value=10R
R81 "Resistor 1206" 1206 32.226,76.102 r270 top value=12R
R82 "Resistor 0603" "0603 (1608 Metric)" 52.197,98.996 r90 top value=3.9k
R83 "Resistor 0603" "0603 (1608 Metric)" 58.356,82.423 r0 top value=32.4k
R84 "Resistor 0603" "0603 (1608 Metric)" 54.61,98.997 r90 top value=3.9k
R85 "Resistor 0603" "0603 (1608 Metric)" 133.802,82.422 r0 top value=32.4k
R86 "NC" "0603 (1608 Metric)" 76.955,65.467 r270 top value=160k
R87 "Resistor 1206" 1206 73.704,76.102 r270 top value=12R
R88 "Resistor 0603" "0603 (1608 Metric)" 73.399,48.577 r270 top value=10R
R89 "Resistor 0603" "0603 (1608 Metric)" 71.367,48.577 r270 top value=10R
R90 "Resistor 1206" 1206 70.453,76.102 r270 top value=12R
R91 "Resistor 0603" "0603 (1608 Metric)" 90.424,98.996 r90 top value=3.9k
R92 "Resistor 0603" "0603 (1608 Metric)" 54.483,82.423 r0 top value=10k
R93 "Resistor 0603" "0603 (1608 Metric)" 92.837,98.997 r90 top value=3.9k
R94 "Resistor 0603" "0603 (1608 Metric)" 130.048,82.423 r0 top value=10k
R95 "NC" "0603 (1608 Metric)" 114.3,65.469 r270 top value=160k
R96 "Resistor 1206" 1206 110.922,76.102 r270 top value=12R
R97 "Resistor 0603" "0603 (1608 Metric)" 110.617,48.577 r270 top value=10R
R98 "Resistor 0603" "0603 (1608 Metric)" 108.585,48.577 r270 top value=10R
R99 "Resistor 1206" 1206 107.671,76.102 r270 top value=12R
R100 "Resistor 0603" "0603 (1608 Metric)" 127.642,98.996 r90 top value=3.9k
R101 "Resistor 0603" "0603 (1608 Metric)" 96.647,82.423 r0 top value=32.4k
R102 "Resistor 0603" "0603 (1608 Metric)" 130.055,98.997 r90 top value=3.9k
R103 "Resistor 0603" "0603 (1608 Metric)" 92.9,82.423 r0 top value=10k
R104 "Resistor 0603" "0603 (1608 Metric)" 194.056,30.988 r0 top value=499R
R105 "Resistor 0603" "0603 (1608 Metric)" 259.969,30.988 r0 top value=499R
R106 "Resistor 0603" "0603 (1608 Metric)" 179.006,32.893 r0 top value=NC
R107 "Resistor 0603" "0603 (1608 Metric)" 244.919,32.893 r0 top value=NC
R108 "Resistor 0603" "0603 (1608 Metric)" 189.23,38.163 r90 top value=499R
R109 "Resistor 0603" "0603 (1608 Metric)" 255.27,38.29 r90 top value=499R
R110 "Resistor 0603" "0603 (1608 Metric)" 190.056,41.021 r0 top value=NC
R111 "Resistor 0603" "0603 (1608 Metric)" 256.095,41.148 r0 top value=NC
R112 "Resistor 0603" "0603 (1608 Metric)" 188.405,26.289 r180 top value=NC
R113 "Resistor 0603" "0603 (1608 Metric)" 254.318,26.289 r180 top value=NC
R114 "Resistor 0603" "0603 (1608 Metric)" 187.198,38.163 r90 top value=499R
R115 "Resistor 0603" "0603 (1608 Metric)" 253.111,38.354 r90 top value=499R
R116 "Resistor 0603" "0603 (1608 Metric)" 186.373,41.021 r180 top value=NC
R117 "Resistor 0603" "0603 (1608 Metric)" 182.753,31.115 r180 top value=499R
R118 "Resistor 0603" "0603 (1608 Metric)" 252.286,41.148 r180 top value=NC
R119 "Resistor 0603" "0603 (1608 Metric)" 248.666,31.115 r180 top value=499R
R120 "Resistor 0603" "0603 (1608 Metric)" 215.265,31.242 r0 top value=499R
R121 "Resistor 0603" "0603 (1608 Metric)" 281.178,31.242 r0 top value=499R
R122 "Resistor 0603" "0603 (1608 Metric)" 200.152,32.893 r0 top value=NC
R123 "Resistor 0603" "0603 (1608 Metric)" 266.065,32.893 r0 top value=NC
R124 "Resistor 0603" "0603 (1608 Metric)" 210.439,38.036 r90 top value=499R
R125 "Resistor 0603" "0603 (1608 Metric)" 276.352,38.036 r90 top value=499R
R126 "Resistor 0603" "0603 (1608 Metric)" 211.328,41.021 r0 top value=NC
R127 "Resistor 0603" "0603 (1608 Metric)" 277.241,41.021 r0 top value=NC
R128 "Resistor 0603" "0603 (1608 Metric)" 209.677,26.416 r180 top value=NC
R129 "Resistor 0603" "0603 (1608 Metric)" 275.59,26.416 r180 top value=NC
R130 "Resistor 0603" "0603 (1608 Metric)" 208.534,38.1 r90 top value=499R
R131 "Resistor 0603" "0603 (1608 Metric)" 274.447,38.1 r90 top value=499R
R132 "Resistor 0603" "0603 (1608 Metric)" 207.709,41.021 r180 top value=NC
R133 "Resistor 0603" "0603 (1608 Metric)" 203.962,31.115 r180 top value=499R
R134 "Resistor 0603" "0603 (1608 Metric)" 273.622,41.021 r180 top value=NC
R135 "Resistor 0603" "0603 (1608 Metric)" 269.875,31.115 r180 top value=499R
R136 "Resistor 0603" "0603 (1608 Metric)" 236.664,31.369 r0 top value=499R
R137 "Resistor 0603" "0603 (1608 Metric)" 302.577,31.369 r0 top value=499R
R138 "Resistor 0603" "0603 (1608 Metric)" 221.615,33.528 r0 top value=NC
R139 "Resistor 0603" "0603 (1608 Metric)" 287.718,33.528 r0 top value=NC
R140 "Resistor 0603" "0603 (1608 Metric)" 232.156,38.29 r90 top value=499R
R141 "Resistor 0603" "0603 (1608 Metric)" 297.942,38.545 r90 top value=499R
R142 "Resistor 0603" "0603 (1608 Metric)" 233.045,41.275 r0 top value=NC
R143 "Resistor 0603" "0603 (1608 Metric)" 298.831,41.402 r0 top value=NC
R144 "Resistor 0603" "0603 (1608 Metric)" 230.949,26.416 r180 top value=NC
R145 "Resistor 0603" "0603 (1608 Metric)" 296.862,26.416 r180 top value=NC
R146 "Resistor 0603" "0603 (1608 Metric)" 229.87,38.29 r90 top value=499R
R147 "Resistor 0603" "0603 (1608 Metric)" 295.783,38.545 r90 top value=499R
R148 "Resistor 0603" "0603 (1608 Metric)" 229.172,41.275 r180 top value=NC
R149 "Resistor 0603" "0603 (1608 Metric)" 225.235,31.242 r180 top value=499R
R150 "Resistor 0603" "0603 (1608 Metric)" 294.894,41.402 r180 top value=NC
R151 "Resistor 0603" "0603 (1608 Metric)" 291.148,31.242 r180 top value=499R
R152 "Resistor 0603" "0603 (1608 Metric)" 129.414,30.353 r0 top value=499R
R153 "Resistor 0603" "0603 (1608 Metric)" 114.237,32.258 r0 top value=NC
R154 "Resistor 0603" "0603 (1608 Metric)" 124.588,37.528 r90 top value=499R
R155 "Resistor 0603" "0603 (1608 Metric)" 125.414,40.386 r0 top value=NC
R156 "Resistor 0603" "0603 (1608 Metric)" 123.763,25.654 r180 top value=NC
R157 "Resistor 0603" "0603 (1608 Metric)" 122.556,37.528 r90 top value=499R
R158 "Resistor 0603" "0603 (1608 Metric)" 121.731,40.386 r180 top value=NC
R159 "Resistor 0603" "0603 (1608 Metric)" 118.111,30.48 r180 top value=499R
R160 "Resistor 0603" "0603 (1608 Metric)" 150.623,30.607 r0 top value=499R
R161 "Resistor 0603" "0603 (1608 Metric)" 135.51,32.258 r0 top value=NC
R162 "Resistor 0603" "0603 (1608 Metric)" 145.797,37.401 r90 top value=499R
R163 "Resistor 0603" "0603 (1608 Metric)" 146.686,40.386 r0 top value=NC
R164 "Resistor 0603" "0603 (1608 Metric)" 145.035,25.781 r180 top value=NC
R165 "Resistor 0603" "0603 (1608 Metric)" 143.892,37.465 r90 top value=499R
R166 "Resistor 0603" "0603 (1608 Metric)" 143.067,40.386 r180 top value=NC
R167 "Resistor 0603" "0603 (1608 Metric)" 139.32,30.48 r180 top value=499R
R168 "Resistor 0603" "0603 (1608 Metric)" 172.085,30.861 r0 top value=499R
R169 "Resistor 0603" "0603 (1608 Metric)" 156.973,32.893 r0 top value=NC
R170 "Resistor 0603" "0603 (1608 Metric)" 167.514,37.655 r90 top value=499R
R171 "Resistor 0603" "0603 (1608 Metric)" 168.403,40.64 r0 top value=NC
R172 "Resistor 0603" "0603 (1608 Metric)" 166.307,25.781 r180 top value=NC
R173 "Resistor 0603" "0603 (1608 Metric)" 165.228,37.655 r90 top value=499R
R174 "Resistor 0603" "0603 (1608 Metric)" 164.53,40.64 r180 top value=NC
R175 "Resistor 0603" "0603 (1608 Metric)" 160.593,30.607 r180 top value=499R
R176 "Resistor 0603" "0603 (1608 Metric)" 210.566,81.788 r90 top value=0R
R177 "Resistor 0603" "0603 (1608 Metric)" 196.469,81.851 r90 top value=0R
R178 "Resistor 0603" "0603 (1608 Metric)" 182.88,82.042 r90 top value=0R
R179 "Resistor 1206" 1206 99.919,26.416 r0 top value=0R
R180 "Resistor 1206" 1206 99.822,6.35 r0 top value=0R
R181 "Resistor 0603" "0603 (1608 Metric)" 297.815,23.495 r90 top value=49R9
R182 "Resistor 0603" "0603 (1608 Metric)" 232.029,23.622 r90 top value=49R9
R183 "Resistor 0603" "0603 (1608 Metric)" 295.783,23.495 r90 top value=49R9
R184 "Resistor 0603" "0603 (1608 Metric)" 229.997,23.622 r90 top value=49R9
R185 "Resistor 0603" "0603 (1608 Metric)" 276.733,23.431 r90 top value=49R9
R186 "Resistor 0603" "0603 (1608 Metric)" 210.82,23.622 r90 top value=49R9
R187 "Resistor 0603" "0603 (1608 Metric)" 274.701,23.431 r90 top value=49R9
R188 "Resistor 0603" "0603 (1608 Metric)" 208.788,23.622 r90 top value=49R9
R189 "Resistor 0603" "0603 (1608 Metric)" 255.397,23.304 r90 top value=49R9
R190 "Resistor 0603" "0603 (1608 Metric)" 189.357,23.432 r90 top value=49R9
R191 "Resistor 0603" "0603 (1608 Metric)" 253.365,23.304 r90 top value=49R9
R192 "Resistor 0603" "0603 (1608 Metric)" 187.325,23.495 r90 top value=49R9
R193 "Resistor 0603" "0603 (1608 Metric)" 167.386,22.987 r90 top value=49R9
R194 "Resistor 0603" "0603 (1608 Metric)" 165.354,22.924 r90 top value=49R9
R195 "Resistor 0603" "0603 (1608 Metric)" 146.177,22.86 r90 top value=49R9
R196 "Resistor 0603" "0603 (1608 Metric)" 144.145,22.86 r90 top value=49R9
R197 "Resistor 0603" "0603 (1608 Metric)" 124.841,22.606 r90 top value=49R9
R198 "Resistor 0603" "0603 (1608 Metric)" 122.682,22.606 r90 top value=49R9
R199 "Resistor 1206" 1206 243.459,9.525 r180 bottom value=0R
R200 "Resistor 1206" 1206 304.292,9.779 r180 bottom value=0R
R201 "Resistor 1206" 1206 184.374,110.109 r0 top value=NC
R202 "Resistor 1206" 1206 199.771,96.49 r270 top value=NC
R203 "Resistor 1206" 1206 202.311,88.392 r90 top value=NC
R205 "Resistor 1206" 1206 185.928,96.744 r270 top value=NC
R206 "Resistor 1206" 1206 188.468,88.519 r90 top value=NC
R207 "Resistor 1206" 1206 174.625,88.235 r90 top value=NC
SW1 "Toggle Switch" "Toggle SW" 37.211,6.985 r0 top
T1 "750313769" "Xmr SN6501" 270.134,54.356 r90 top
T2 "750313769" "Xmr SN6501" 232.034,54.356 r90 top
T3 "750313769" "Xmr SN6501" 308.227,54.991 r90 top
T4 "750313769" "Xmr SN6501" 148.715,54.349 r90 top
T5 "750313769" "Xmr SN6501" 42.67,54.356 r90 top
T6 "750313769" "Xmr SN6501" 80.897,54.356 r90 top
T7 "750313769" "Xmr SN6501" 118.115,54.356 r90 top
TP1 "Test point" TP_1.6mm 147.955,332.232 r0 top
TP2 "Test point" TP_1.6mm 156.337,257.175 r0 top
TP3 "Test point" TP_1.6mm 154.94,177.038 r0 top
TP4 "Test point" TP_1.6mm 224.536,269.367 r0 top
TP5 "Test point" TP_1.6mm 225.552,195.58 r0 top
TP6 "Test point" TP_1.6mm 223.52,128.397 r0 top
TP7 "Test point" TP_1.6mm 333.883,32.004 r0 top
TP8 "Test point" TP_1.6mm 334.01,26.924 r0 top
TP9 "Test point" TP_1.6mm 309.245,16.891 r0 top
TP10 "Test point" TP_1.6mm 184.785,6.35 r90 top
TP11 "Test point" TP_1.6mm 76.962,35.56 r90 top
TP12 "Test point" TP_1.6mm 117.729,13.335 r90 top
U1 "AMC1100" SOIC8 263.449,64.671 r180 top
U2 "TLV70450DBV" SOT23-5 268.358,82.931 r90 top
U3 "SN6501" SOT23-5 274.52,49.229 r180 top
U4 "TPS7A30" 8-TSSOP 284.274,74.617 r180 top
U5 "AMC1100" SOIC8 225.349,64.671 r180 top
U6 "TLV70450DBV" SOT23-5 230.258,82.931 r90 top
U7 "SN6501" SOT23-5 236.42,49.229 r180 top
U8 "TPS7A30" 8-TSSOP 246.174,74.617 r180 top
U9 "AMC1100" SOIC8 301.542,65.306 r180 top
U10 "TLV70450DBV" SOT23-5 306.451,83.566 r90 top
U11 "SN6501" SOT23-5 312.613,49.864 r180 top
U12 "TPS7A30" 8-TSSOP 322.367,75.252 r180 top
U13 "TLV70450DBV" SOT23-5 146.939,82.924 r90 top
U14 "SN6501" SOT23-5 153.101,49.222 r180 top
U15 "TPS7A30" 8-TSSOP 162.855,74.61 r180 top
U16 "AMC1100" SOIC8 183.291,64.643 r180 top
U17 "AMC1100" SOIC8 196.976,64.515 r180 top
U18 "AMC1100" SOIC8 210.947,64.621 r180 top
U19 "AMC1100" SOIC8 35.985,64.671 r180 top
U20 "TLV70450DBV" SOT23-5 40.894,82.931 r90 top
U21 "SN6501" SOT23-5 47.056,49.229 r180 top
U22 "TPS7A30" 8-TSSOP 56.81,74.617 r180 top
U23 "AMC1100" SOIC8 74.212,64.671 r180 top
U24 "TLV70450DBV" SOT23-5 79.121,82.931 r90 top
U25 "SN6501" SOT23-5 85.283,49.229 r180 top
U26 "TPS7A30" 8-TSSOP 95.037,74.617 r180 top
U27 "AMC1100" SOIC8 111.43,64.671 r180 top
U28 "TLV70450DBV" SOT23-5 116.339,82.931 r90 top
U29 "SN6501" SOT23-5 122.501,49.229 r180 top
U30 "TPS7A30" 8-TSSOP 132.255,74.617 r180 top
U32 "ISL21010" SOT_23 109.474,7.747 r0 top
U33 "AD8132" SO8_L 188.341,33.401 r0 top
U34 "AD8132" SO8_L 254.254,33.401 r0 top
U35 "AD8132" SO8_L 209.55,33.401 r0 top
U36 "AD8132" SO8_L 275.463,33.401 r0 top
U37 "AD8132" SO8_L 231.14,33.401 r0 top
U38 "AD8132" SO8_L 297.053,33.401 r0 top
U40 "AD8132" SO8_L 123.699,32.766 r0 top
U41 "AD8132" SO8_L 144.908,32.766 r0 top
U42 "AD8132" SO8_L 166.498,32.766 r0 top

## Footprints (in the part's own frame and the unit in brackets; to place one, negate y for a bottom-side part, rotate by r counter-clockwise, add the part's x,y. Pads: shape width x height; smd on the part's side, far side on the other; paste and mask are expansions set on the pad)
"2 pin Terminal" [mm] "OSTYC022150 terminal"
  round 2.2 hole 1.3: 1(-2.54,0) 2(2.54,0)
  silkscreen extent -6,-5 6,5